# EAGLE board FA (EAGLE 9.3.0)
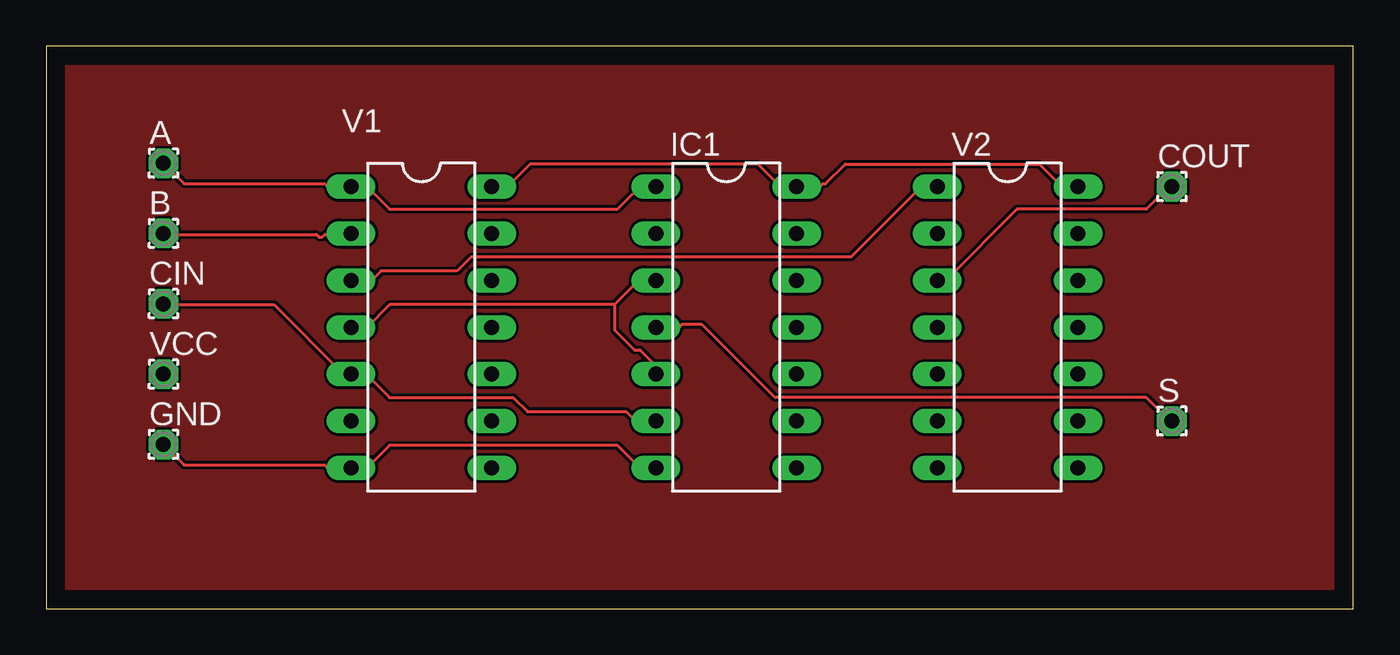
[diagram p0: board, top side]
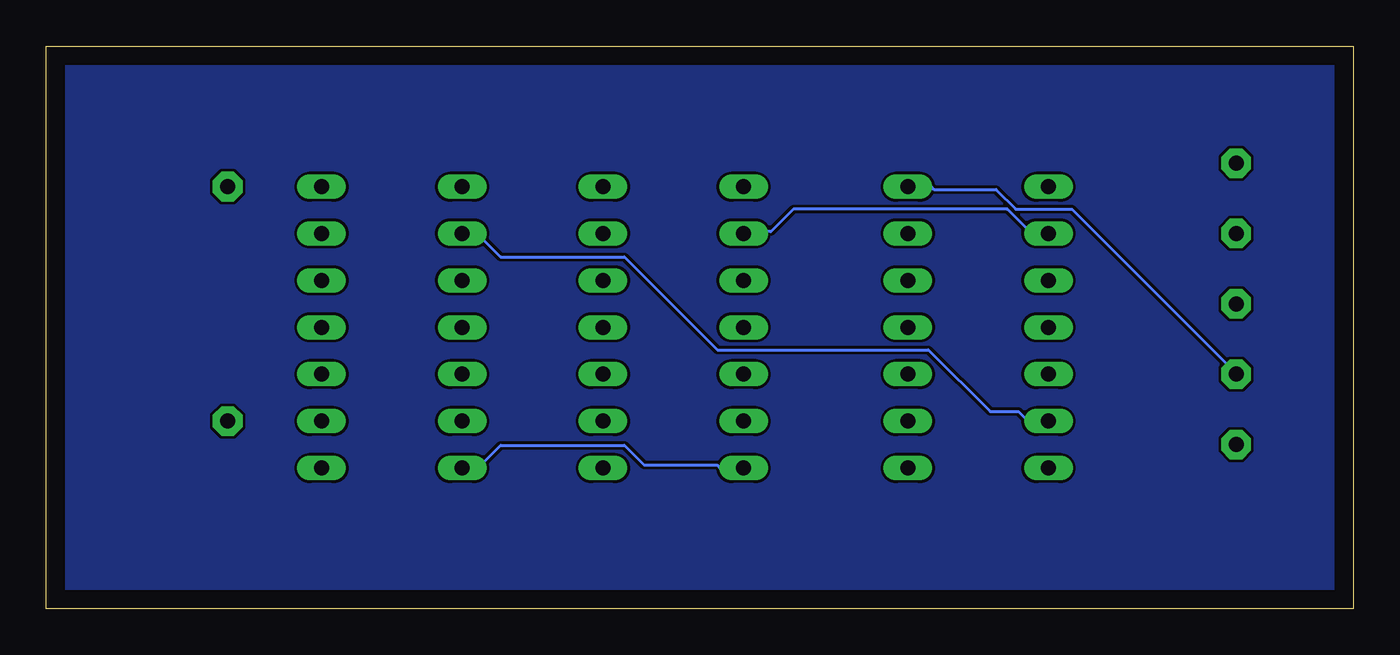
[diagram p1: board, bottom side, seen from below]

Size 70.79 x 30.47 mm. Coordinates in mm from the lower left corner, seen from the top.
Outline: 0,0 70.79,0 70.79,30.47 0,30.47 0,0
Copper layers (1*16): Top 0.035mm / dielectric 1.5mm / Bottom 0.035mm
Design rules "default": minimum track width 6mil, minimum drill 0.35mm, track to track 6mil, track to pad 6mil, pad to pad 6mil, via to via 6mil, smd to smd 6mil, copper to edge 40mil, drill to drill 6mil, minimum pad ring 10mil, minimum via ring 8mil, stop-mask expansion 4mil, vias tented up to drill 0mil, thermal gap 10mil

## Footprints (pad centres in the part's own frame; a part is rotated, then mirrored left to right if it is on the bottom)
1,6/0,8 = drill 0.813 pad 1.6 octagon: 1 0,0
DIL14 = drill 0.813 long: 1 -7.62,-3.81; 2 -5.08,-3.81; 3 -2.54,-3.81; 4 0,-3.81; 5 2.54,-3.81; 6 5.08,-3.81; 7 7.62,-3.81; 8 7.62,3.81; 9 5.08,3.81; 10 2.54,3.81; 11 0,3.81; 12 -2.54,3.81; 13 -5.08,3.81; 14 -7.62,3.81

## Placement (x,y rotation side)
A  WIREPAD1,6/0,8  [1,6/0,8]  6.35,24.13 0 top
B  WIREPAD1,6/0,8  [1,6/0,8]  6.35,20.32 0 top
CIN  WIREPAD1,6/0,8  [1,6/0,8]  6.35,16.51 0 top
COUT  WIREPAD1,6/0,8  [1,6/0,8]  60.96,22.86 0 top
GND  [1,6/0,8]  6.35,8.89 0 top
IC1  74386N  [DIL14]  36.83,15.24 270 top
S  WIREPAD1,6/0,8  [1,6/0,8]  60.96,10.16 0 top
V1  7408N  [DIL14]  20.32,15.24 270 top
V2  7432N  [DIL14]  52.07,15.24 270 top
VCC  [1,6/0,8]  6.35,12.7 0 top

## Library data of the parts
A B CIN COUT GND S VCC = wirepad
IC1 = 74xx-us
V1 V2 = 74ttl-din

## Nets
GND: GND.1 IC1.7 V1.7 V2.7
N$1: A.1 IC1.1 V1.1
N$2: B.1 IC1.2 V1.2
N$3: IC1.3 IC1.5 V1.4
N$4: CIN.1 IC1.6 V1.5
N$5: V1.3 V2.1
N$6: IC1.4 S.1
N$7: V1.6 V2.2
N$11: COUT.1 V2.3
VCC: IC1.14 V1.14 V2.14 VCC.1

## Tracks (layer width: path | path; a pad name or v marks a point on that pad's centre or on a via)
GND
  Top 0.152: GND.1 7.47,7.77 15.09,7.77 15.24,7.62 V1.7 17.37,7.62 18.59,8.84 30.94,8.84 32.16,7.62 IC1.7
  Bottom 0.152: IC1.7 34.29,7.62 34.44,7.77 38.41,7.77 39.47,8.84 46.18,8.84 47.4,7.62 V2.7
N$1
  Top 0.152: A.1 7.47,23.01 15.09,23.01 15.24,22.86 V1.1 17.37,22.86 18.59,21.64 30.94,21.64 32.16,22.86 IC1.1
N$2
  Top 0.152: V1.2 16.46,20.27 15.09,20.27 14.94,20.12 14.78,20.12 14.63,20.27 6.4,20.27 B.1
  Bottom 0.152: IC1.2 32.92,20.42 31.55,20.42 30.33,21.64 18.75,21.64 17.53,20.42 16.61,20.42 V1.2
N$3
  Top 0.152: V1.4 17.37,15.24 18.59,16.46 30.79,16.46 | 30.79,16.46 32,17.68 32.92,17.68 IC1.3 | 30.79,16.46 30.79,15.09 31.85,14.02 32.16,14.02 32.92,13.26 32.92,12.8 IC1.5
N$4
  Top 0.152: CIN.1 6.4,16.46 12.34,16.46 16,12.8 16.46,12.8 V1.5 16.61,12.65 17.37,12.65 18.59,11.43 25.3,11.43 26.06,10.67 31.39,10.67 31.85,10.21 32.92,10.21 IC1.6
N$5
  Top 0.152: V2.1 47.4,22.86 43.59,19.05 23.01,19.05 22.25,18.29 18.14,18.29 17.68,17.83 16.61,17.83 V1.3
N$6
  Top 0.152: IC1.4 34.29,15.24 34.44,15.39 35.51,15.39 39.47,11.43 59.59,11.43 60.96,10.06 S.1
N$7
  Bottom 0.152: V1.6 16.61,10.21 17.68,10.21 18.14,10.67 19.66,10.67 23.01,14.02 34.44,14.02 39.47,19.05 46.18,19.05 47.4,20.27 48.16,20.27 V2.2
N$9
  pour Top: 0,30.48 71.12,30.48 71.12,0 0,0
N$10
  pour Bottom: 0,30.48 71.12,30.48 71.12,0 0,0
N$11
  Top 0.152: COUT.1 60.81,22.86 59.59,21.64 52.58,21.64 48.77,17.83 48.31,17.83 V2.3
VCC
  Top 0.152: V1.14 24.99,22.86 26.21,24.08 38.56,24.08 39.78,22.86 IC1.14 41.91,22.86 42.06,23.01 42.22,23.01 43.28,24.08 53.8,24.08 55.02,22.86 V2.14
  Bottom 0.152: V1.14 22.86,22.86 22.71,22.71 19.36,22.71 18.29,21.64 15.24,21.64 6.4,12.8 VCC.1